# Altium PCB mini-rocket.PcbDoc (part 2 of 2)
Units mil, origin at the board's own origin, x right, y up, seen from the top; angles counter-clockwise.
Board outline 4500 x 2250 mil, 4 copper layers (Top Layer, GND, PWR, Bottom Layer), stack 63.138 mil thick; 83 components, 60 nets, 294 pads, 72 vias.
Unrouted connection lines stored in the file: 32.
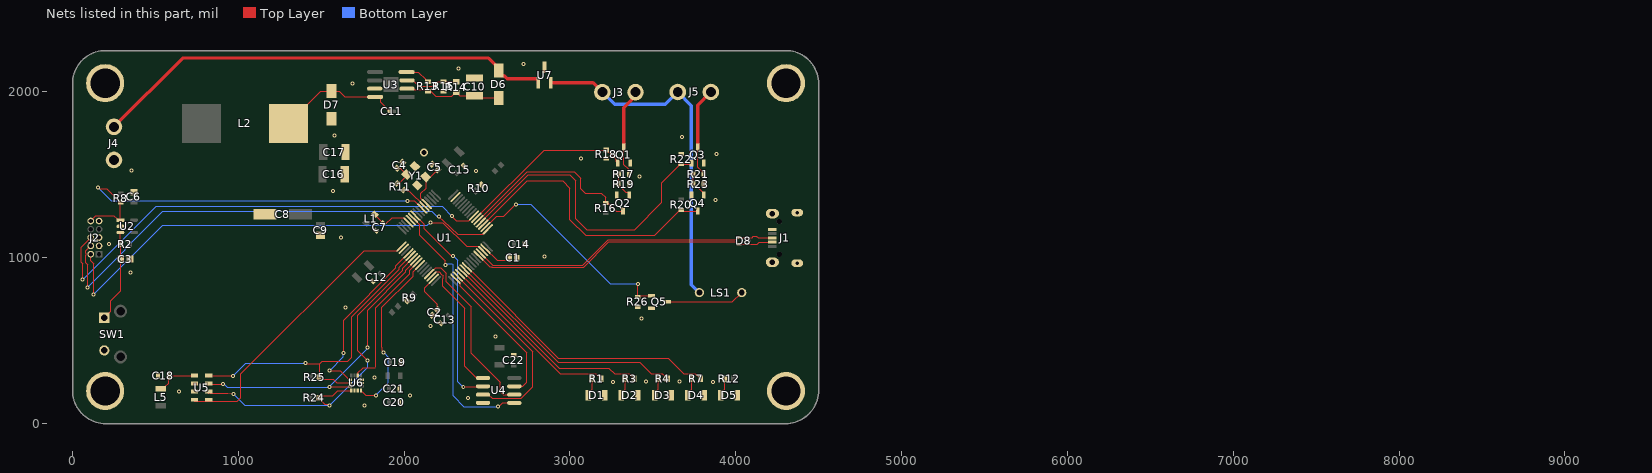
[diagram p4: the nets of this part, all layers, seen from the top]

## Via types
v1: diameter 24, hole 12, Top Layer to Bottom Layer, 71 vias
v2: diameter 50, hole 28, Top Layer to Bottom Layer, 1 vias

## Nets (pads, with @x,y where several pads share a name; then routed paths per layer and width w, separated by ;. In a path a pad name is that pad's centre, name@x,y a point inside that pad or via, vN(x,y) a via of type N, cw(c..) or ccw(c..) an arc to the next point about the centre after c; other vN are vias at no path point) (continued)
BUZZER: Q5.1 R26.1 U1.50 | length 1337.8
  Top Layer w6.79: U1.50@2490.37,1185.42 2491.73,1185.42 2519.3,1212.99 2521.32,1212.99 2557.93,1249.61 2600,1249.61 v1(2673.23,1322.83) ; v1(3409.45,842.52) 3409.45,764.45 R26.1@3409.56,764.34 3416.45,771.23 Q5.1@3491.33,771.23
  Bottom Layer w6.79: v1(2673.23,1322.83) 2763.78,1322.83 3244.09,842.52 v1(3409.45,842.52)
COM: C1.2 C2.2 C3.1 C4.2 C5.2 C6.1 C7.1 C8.K C9.1 C10.1 C12.2 C13.2 C14.2 C15.2 C16.2 C17.2 C18.2 C19.1 C20.1 C21.1 C22.2 D1.K D2.K D3.K D4.K D5.K D7.A J1.5 J1.Shell J2.3 J2.5 J2.9 J4.2 pad.2 pad.3 pad.4 pad.C Q1.2 Q2.2 Q3.2 Q4.2 Q5.2 R9.1 R10.1 R15.1 R18.1 R19.1 R22.2 R23.1 R26.2 SW1.2 U1.12 U1.18 U1.63 U2.2 U3.7 U4.4 U5.2 U5.3 U6.2 U6.3 U6.6 U6.7 U7.3 Y1.2 Y1.4 | length 3.4
  Top Layer w6.79: R10.1@2467.61,1439.5 R10.1@2467.61,1442.89
  other v1: 1760.83,108.27 2384.84,154.53 2035.43,169.29 642.72,193.9 3260.83,250 3861.22,250.98 3659.45,252.95 3459.65,253.94 1821.85,277.56 2552.17,524.61 2160,590 3430.12,632.87 1645.67,699.8 350,910 2847.44,1007.87 220.53,1083.61 1620.08,1122.05 3877.95,1347.44 1570.87,1401.57 3419.29,1490.16 2432.09,1522.64 355.31,1526.57 3066.93,1597.44 3882.87,1625 3675.2,1729.33 1579.72,1736.22 1687.99,2050.2 2327.76,2142.72 2720,2170
  other v2: 2120,1635
D_N: D8.2 J1.2 U1.44 | length 1873.2
  Top Layer w5.93: U1.44@2448.62,1012.82 2516.83,944.61 2528.86,944.61 2528.98,944.48 3082.28,944.48 3233.29,1095.49 3998.99,1095.49 4011.81,1082.68 4128.27,1082.68 4140.01,1094.41 J1.2@4220.83,1094.41
D_P: D8.1 J1.3 U1.45 | length 1861.4
  Top Layer w5.93: U1.45@2462.54,1026.74 2533.61,955.66 3077.65,955.66 3229.94,1107.95 3997.72,1107.95 4011.81,1122.05 4099.09,1122.05 4105.65,1128.61 4124.67,1128.61 4125,1128.28 4129.6,1128.28 4136.82,1121.05 J1.3@4219.78,1121.05
EJECT_1: J3.1 Q1.3 R17.2 | length 536.1
  Top Layer w6.79: Q1.3@3325,1668.23 3325,1561.57 3347.42,1539.15 3348.28,1539.15 3355.51,1531.91 R17.2@3355.51,1505 ; J3.1@3395,1975 J3.1@3395,1999
  Top Layer w20: Q1.3@3325,1668.23 3325,1905 J3.1@3395,1975
EJECT_2: J5.1 Q3.3 R21.2 | length 542.8
  Top Layer w6.79: Q3.3@3770,1668.23 3770,1545.43 3805.51,1509.92 R21.2@3805.51,1505
  Top Layer w20: Q3.3@3770,1668.23 3770,1920 J5.1@3850,2000
EN: R14.1 R15.2 U3.3 | length 330.5
  Top Layer w6.79: U3.3@2017.28,2070 2051.45,2070 2087.99,2033.46 2173.08,2033.46 2201.47,2061.85 R14.1@2320.87,2061.85
FIRE_1: Q1.1 R18.2 U1.54 | length 1062.6
  Top Layer w6.79: U1.54@2434.7,1241.1 2843.6,1650 3222.95,1650 3233.34,1639.61 3233.34,1636.87 3280.16,1590.04 3280.16,1579.21 Q1.1@3287.6,1571.77
FIRE_2: Q3.1 R22.1 U1.52 | length 1890.8
  Top Layer w6.79: U1.52@2462.54,1213.26 2749.28,1500 3000,1500 3035,1465 3035,1235 3100,1170 3390,1170 3554.16,1334.16 3554.16,1452.79 3656.66,1555.28 R22.1@3656.66,1567.07 ; R22.1@3670,1564.49 3725.32,1564.49 Q3.1@3732.6,1571.77
HOLD: U1.34 U4.7 | length 886.6
  Top Layer w6.79: U1.34@2309.42,873.63 2309.42,872.27 2336.99,844.7 2336.99,842.68 2337.86,841.82 2337.86,827.14 2738.38,426.62 2738.38,248.23 2715.15,225 U4.7@2664.49,225
INT1: U1.25 U6.4 | length 1034.6
  Top Layer w6.79: U6.4@1739.53,199.23 1739.53,194.8 1743.02,191.31 1747.45,191.31 1768.76,170 v1(1830,170) ; v1(1875.5,430) 1867.23,438.27 1867.23,459.08 1865.78,460.53 1865.78,700.78 2055,890 2055,915.72 2095.06,955.78 U1.25@2095.06,957.14
  Bottom Layer w6.79: v1(1830,170) 1905,245 1905,400.25 1875.5,429.75 v1(1875.5,430)
INT2: U1.24 U6.9 | length 872.8
  Top Layer w6.79: U6.9@1719.84,290.77 1721.24,292.17 1721.24,306.81 1752.84,338.4 1826.03,338.4 1830,342.38 1830,700 2035,905 2035,923.56 2081.14,969.7 U1.24@2081.14,971.06
LED_1: R1.1 U1.36 | length 1111
  Top Layer w6.79: U1.36@2337.26,901.47 2338.62,901.47 2366.19,873.9 2368.2,873.9 2942.1,300 3112.86,300 3112.96,300.09 3153.89,300.09 3153.99,300 3156.57,300 R1.1@3186.57,270
LED_2: R3.1 U1.37 | length 1302.8
  Top Layer w6.79: U1.37@2351.18,915.38 2352.54,915.38 2380.11,887.82 2382.12,887.82 2934.94,335 3235,335 3270,300 3312.86,300 3312.96,300.09 3353.89,300.09 3353.99,300 3356.57,300 R3.1@3386.57,270
LED_3: R4.1 U1.38 | length 1494.6
  Top Layer w6.79: U1.38@2365.1,929.3 2366.46,929.3 2394.03,901.74 2396.04,901.74 2927.78,370 3420,370 3490,300 3512.86,300 3512.96,300.09 3553.89,300.09 3553.99,300 3556.57,300 R4.1@3586.57,270
LED_4: R7.1 U1.39 | length 1686.5
  Top Layer w6.79: U1.39@2379.02,943.22 2380.38,943.22 2407.95,915.66 2409.96,915.66 2930.62,395 3591.28,395 3686.28,300 3712.86,300 3712.96,300.09 3753.89,300.09 3753.99,300 3756.57,300 R7.1@3786.57,270
NetC4_1: C4.1 R11.2 Y1.1 | length 159.5
  Top Layer w6.79: C4.1@1955.04,1541.66 1957.13,1539.57 1977.25,1539.57 Y1.1@2014.94,1501.88 2014.94,1496.25 R11.2@1960.13,1441.44
NetD1_A: D1.A R1.2 | length 109.7
  Top Layer w6.79: D1.A@3110,170 3110,184.76 3133.43,208.19 R1.2@3133.43,270
NetD2_A: D2.A R3.2 | length 109.7
  Top Layer w6.79: D2.A@3310,170 3310,184.76 3333.43,208.19 R3.2@3333.43,270
NetD3_A: D3.A R4.2 | length 109.7
  Top Layer w6.79: D3.A@3510,170 3510,184.76 3533.43,208.19 R4.2@3533.43,270
NetD4_A: D4.A R7.2 | length 109.7
  Top Layer w6.79: D4.A@3710,170 3710,184.76 3733.43,208.19 R7.2@3733.43,270
NetD5_A: D5.A R12.2 | length 109.7
  Top Layer w6.79: D5.A@3910,170 3910,184.76 3933.43,208.19 R12.2@3933.43,270
NetLS1_N: LS1.N Q5.3 | length 471.4
  Top Layer w6.79: Q5.3@3587.79,733.83 3979.73,733.83 LS1.N@4035.91,790
NetQ2_1: Q2.1 R17.1 R19.2 | length 161.1
  Top Layer w6.79: R17.1@3294.49,1505 3294.49,1446.3 R19.2@3293.19,1445 3293.19,1440.08 3337.76,1395.5 3349.97,1395.5 3357.4,1388.07 Q2.1@3357.4,1378.23
NetQ4_1: Q4.1 R21.1 R23.2 | length 159.2
  Top Layer w6.79: R21.1@3744.49,1505 3744.49,1440.08 3752.91,1431.66 3763.81,1431.66 3807.4,1388.07 Q4.1@3807.4,1378.23
OSC_IN: C5.1 U1.5 Y1.3 | length 281.1
  Top Layer w6.79: Y1.3@2129.08,1487.96 Y1.3@2131.86,1485.18 ; U1.5@2136.82,1324.62 2101.11,1360.33 2101.11,1387.87 2131.86,1418.62 Y1.3@2131.86,1485.18 ; C5.1@2202.44,1529.84 2160.55,1487.96 2160.47,1487.96 2157.69,1485.18 Y1.3@2131.86,1485.18
OSC_OUT: R11.1 U1.6 | length 163.3
  Top Layer w6.79: R11.1@2003.98,1404.56 2010.61,1411.18 2012.09,1411.18 2018.72,1404.56 2029.04,1404.56 U1.6@2122.9,1310.7
PGOOD: R13.2 U3.4 | length 162.7
  Top Layer w6.79: U3.4@2015,2120 2085.71,2120 2129.38,2076.33 2129.38,2071.41 2138.78,2062.01 R13.2@2143.7,2062.01 ; R13.2@2149.84,2066.85 R13.2@2154.84,2061.85
RESET_N: J2.10 R8.1 U1.7 U2.1 | length 2490
  Top Layer w6.79: J2.10@110,1222 141.39,1253.39 249.96,1253.39 268.31,1235.04 268.31,1234.48 275.39,1227.4 U2.1@288.64,1227.4 288.64,1334.04 R8.1@290,1335.39 287.05,1335.39 207.48,1414.96 162.8,1414.96 v1(154.53,1423.23) ; v1(2019.68,1343.72) 2062.04,1343.72 U1.7@2108.98,1296.78
  Bottom Layer w6.79: v1(154.53,1423.23) 234.04,1343.72 v1(2019.68,1343.72)
SENSE_1: Q2.3 R16.2 U1.53 | length 1153.4
  Top Layer w6.79: U1.53@2448.62,1227.18 2741.44,1520 3025,1520 3065,1480 3065,1415.61 3090.61,1390 3190,1390 3215,1365 R16.2@3215,1340.51 ; R16.2@3215,1330.51 R16.2@3215,1340.51 ; Q2.3@3320,1281.77 3278.66,1281.77 3219.92,1340.51 R16.2@3215,1340.51
SENSE_2: Q4.3 R20.2 U1.51 | length 1718.8
  Top Layer w6.79: U1.51@2476.45,1199.34 2742.11,1465 2955,1465 3000,1420 3000,1230 3095,1135 3510.59,1135 3665.08,1289.49 R20.2@3670,1289.49 3677.72,1281.77 Q4.3@3770,1281.77
SPI1_CS_ALTIMITER: U1.17 U5.4 U5.5 | length 1721.6
  Top Layer w6.79: U5.4@733,134.95 821.31,134.95 993.22,134.95 1015.75,157.48 1015.75,301.18 1758.01,1043.44 1958.65,1043.44 U1.17@1983.71,1068.5
SPI1_CS_IMU: U1.20 U6.12 | length 1050.7
  Top Layer w6.79: v1(1550,320) 1550.85,319.15 1588.57,319.15 1615.18,319.15 1669.65,264.69 U6.12@1674.07,264.69 ; v1(1634.61,425) 1634.61,624.61 1950,940 1950,951.27 U1.20@2025.47,1026.74
  Bottom Layer w6.79: v1(1550,320) 1632.82,402.82 1632.82,423.21 v1(1634.61,425)
SPI1_MISO: R24.2 U1.22 U5.6 U6.1 | length 2215.6
  Top Layer w6.79: U5.6@819.61,184.17 U5.6@821.31,184.17 ; U5.6@821.31,192.98 829.73,184.57 937.49,184.57 v1(970.44,179.56) ; v1(1550,110) 1542.95,117.05 1520.87,117.05 1496.47,141.45 1494.39,141.45 1482.89,152.95 1482.89,157.11 1494.39,168.61 1568.86,168.61 1599.48,199.23 U6.1@1680.47,199.23 ; v1(1780,380) 1720,440 1720,655 1991.11,926.11 1991.11,936.7 U1.22@2053.3,998.9 ; U1.22@2052.3,999.9 U1.22@2053.3,1000.9
  Bottom Layer w6.79: v1(970.44,179.56) 1040,110 v1(1550,110) 1780,340 v1(1780,380)
SPI1_MOSI: U1.23 U5.7 U6.14 | length 1845.2
  Top Layer w6.79: U5.7@819.61,233.38 819.61,233.78 823.43,237.59 v1(908,237.59) ; v1(1550,220) 1552.66,222.66 1671.42,222.66 U6.14@1674.07,225.31 ; v1(1780,460) 1780,685 2010,915 2010,926.4 2067.22,983.62 U1.23@2067.22,984.98
  Bottom Layer w6.79: v1(908,237.59) 915.99,237.59 933.58,220 v1(1550,220) 1550,225 1780,455 v1(1780,460)
SPI1_SCK: R25.2 U1.21 U5.8 U6.13 | length 1962
  Top Layer w6.79: U5.8@819.61,282.59 824.61,287.59 v1(968,287.59) ; v1(1405,365) 1409.38,360.62 1490.62,360.62 ; R25.2@1485.62,280 1485.62,277.92 1497.12,266.42 1570.93,266.42 1592.35,245 U6.13@1674.07,245 ; R25.2@1490.62,280 1490.62,360.62 ; U1.21@2039.38,1012.82 1970,943.44 1970,930 1685,645 1685,400 1660,375 1505,375 1490.62,360.62
  Bottom Layer w6.79: v1(968,287.59) 1045.41,365 v1(1405,365)
SPI2_CS: U1.30 U4.1 | length 835.3
  Top Layer w6.79: U1.30@2164.66,887.55 2166.02,887.55 2194.45,915.98 2210.8,915.98 2224.72,902.06 2234.85,891.93 2234.85,877.6 2231.25,873.99 2231.25,828.75 2365,695 2365,345 2431.78,278.22 2472.29,278.22 U4.1@2475.51,275
SPI2_MISO: U1.10 U4.2 | length 1288.4
  Top Layer w6.79: U1.10@2067.22,1255.02 2121.09,1201.15 2121.09,1173.91 2280.34,1014.66 2292.42,1014.66 v1(2295.28,1011.81) ; v1(2356.39,220) 2358.89,222.5 2473.01,222.5 U4.2@2475.51,225
  Bottom Layer w6.79: v1(2295.28,1011.81) 2322.83,984.25 2322.83,253.56 2347.2,229.19 2356.39,229.19 v1(2356.39,220)
SPI2_MOSI: U1.11 U4.5 | length 1616.9
  Top Layer w6.79: U1.11@2053.3,1241.1 2053.3,1239.74 2095,1198.04 2095,1135 2248.03,981.97 v1(2248.03,956.69) ; v1(2566.93,102.36) 2571.4,102.36 2594.04,125 U4.5@2664.49,125
  Bottom Layer w6.79: v1(2248.03,956.69) 2256.3,964.96 2281.57,964.96 2281.64,965.03 2290.84,965.03 2294.81,961.06 2294.81,166.8 2359.25,102.36 v1(2566.93,102.36)
SPI2_SCK: U1.29 U4.6 | length 1073.3
  Top Layer w6.79: U1.29@2150.74,901.47 2152.1,901.47 2190.63,940 2220,940 2253.15,906.85 2253.15,856.85 2405,705 2405,425 2579.83,250.17 2579.83,193.12 2597.95,175 U4.6@2664.49,175
SW: C11.1 D7.C L2.1 U3.8 | length 760.6
  Top Layer w6.79: L2.1@1301.81,1810 1496.73,2004.92 D7.C@1562.01,2004.92 1607.87,2004.92 1642.8,1970 U3.8@1824.76,1970 1849.64,1970 1857.82,1961.82 1857.82,1936.94 1907.41,1887.35 1907.41,1886.84 1914.25,1880 C11.1@1915.04,1880
SWCLK: J2.4 U1.49 | length 2945.6
  Top Layer w6.79: v1(90,820) 91.16,821.16 91.16,958.44 79.34,970.25 79.34,1015.24 cw(c110,1022) 79.34,1028.76 79.34,1041.34 J2.4@110,1072 ; v1(2208.7,1247.63) 2237.11,1222.88 2321.71,1141.73 2473.16,1141.73 2502.93,1171.5 U1.49@2504.29,1171.5
  Bottom Layer w6.79: v1(90,820) 319.15,1049.15 319.15,1054.15 545,1280 2166.9,1280 2199.27,1247.63 v1(2208.7,1247.63)
SWDIO: J2.2 U1.46 | length 2845.1
  Top Layer w6.79: J2.2@110,1022 110,981.69 127.3,964.39 v1(127.3,779.65) ; v1(2157.48,1212.6) 2207.72,1211.25 ccw(c2208.7,1247.63) 2211.6,1211.35 2227.23,1212.6 2232.85,1212.6 2376.36,1069.09 2446.66,1069.09 U1.46@2473.09,1042.66
  Bottom Layer w6.79: v1(127.3,779.65) 542.65,1195 2139.88,1195 v1(2157.48,1212.6)
T_TRACESWO: J2.6 U1.55 | length 2873.6
  Top Layer w6.79: v1(61.16,867.8) 61.16,962.83 51.17,972.81 51.17,1063.17 J2.6@110,1122 ; v1(2287.4,1251.97) 2314.96,1224.41 2388.81,1224.41 2419.42,1255.02 U1.55@2420.78,1255.02
  Bottom Layer w6.79: v1(61.16,867.8) 183.96,990.61 184.72,990.61 504.11,1310 2229.37,1310 v1(2287.4,1251.97)
User_RST: C3.2 R2.2 SW1.1 U2.3 | length 556.7
  Top Layer w6.79: SW1.1@191.5,638.5 230,677 230,740 291.54,801.54 C3.2@291.54,991.9 R2.2@291.54,1081.9 288.64,1084.8 U2.3@288.64,1152.6
V_CAP_1: C2.1 U1.31 | length 238.5
  Top Layer w6.79: U1.31@2178.58,873.63 2178.58,872.27 2125,818.69 2125,796.43 2200.28,721.14 2200.28,695.28 C2.1@2195.46,690.46
V_CAP_2: C1.1 U1.47 | length 178.5
  Top Layer w6.79: U1.47@2490.37,1054.58 2559.95,985 2617.96,985 2632.96,1000 C1.1@2633.86,1000
VBATT: D6.A J4.1 U7.1 | length 2820.7
  Top Layer w20: J4.1@250,1790 664.72,2204.72 2508.86,2204.72 2570.87,2142.72 2570.87,2118.31 2590.39,2098.78 2602.6,2098.78 2622.2,2079.17 2808.23,2079.17 2809.06,2078.35 U7.1@2809.06,2055.12
VBATT_CONTROLLED: J3.2 J5.2 LS1.P U7.2 | length 2114.8
  Top Layer w20: U7.2@2883.86,2055.12 3138.88,2055.12 J3.2@3195,1999
  Bottom Layer w20: J3.2@3195,1999 3268.8,1925.2 3575.2,1925.2 J5.2@3650,2000 3732.28,1917.72 3732.28,837.72 LS1.P@3780,790
VDD: C22.1 L7.2 U4.8 | length 165.7
  Top Layer w6.79: L7.2@2574.8,356.3 2655.51,356.3 C22.1@2660.43,351.38 2664.49,347.32 U4.8@2664.49,275
VDD: C18.1 L5.2 U5.1 | length 262.3
  Top Layer w6.79: L5.2@532.19,210.16 546.95,210.16 560.29,223.5 560.29,225.29 579.65,244.65 C18.1@579.65,287.48 582.12,289.95 733.24,289.95 U5.1@734.69,291.41
VDDA: C7.2 L1.2 U1.13 | length 255.4
  Top Layer w6.79: L1.2@1824.41,1262.34 1824.41,1257.6 C7.2@1874.54,1207.47 1878.02,1203.99 1889.93,1203.99 1927.63,1241.69 1995.67,1241.69 2024.11,1213.26 U1.13@2025.47,1213.26
VIN: C10.2 D6.C R13.1 R14.2 U3.2 | length 598.8
  Top Layer w6.79: U3.2@2017.28,2020 2056.25,2020 2061.92,2014.32 2134.3,2014.32 R13.1@2143.7,2004.92 ; R13.1@2143.7,2004.76 2159.76,2004.76 2191.62,1972.91 2287.87,1972.91 2297.09,1982.13 2297.09,1984.3 2310.83,1998.03 R14.2@2312.99,1998.03 2315.16,1998.03 2335.83,1977.36 C10.2@2425.2,1977.36 2438.58,1963.98 D6.C@2570.87,1963.98
WP: U1.35 U4.3 | length 1191.3
  Top Layer w6.79: U1.35@2323.34,887.55 2323.34,886.19 2775,434.53 2775,221.2 2705.6,151.8 2530.21,151.8 2507.01,175 U4.3@2475.51,175
pads on no net: J1.1 J1.4 J1.MH1 J1.MH2 J2.7 J2.8 SW1.3 SW1.4 U1.2 U1.3 U1.4 U1.8 U1.9 U1.14 U1.15 U1.16 U1.26 U1.27 U1.33 U1.40 U1.41 U1.42 U1.43 U1.56 U1.57 U1.58 U1.59 U1.61 U1.62 U2.4 U3.6 U3.9 U6.10 U6.11
copper on no net: | length 103920.8
  Top Layer w1: 8209.46,735.32 8309.15,835 8429.15,955 8549.15,1075 8669.15,1195 8789.15,1315 8909.15,1435 9029.15,1555 9149.15,1675 9269.15,1795 9329.15,1855 ; 8209.46,795.32 8249.15,835 8369.15,955 8489.15,1075 8609.15,1195 8729.15,1315 8849.15,1435 8969.15,1555 9089.15,1675 9209.15,1795 9329.15,1915 ; 8209.46,855.32 8309.15,955 8429.15,1075 8549.15,1195 8669.15,1315 8789.15,1435 8909.15,1555 9029.15,1675 9149.15,1795 9269.15,1915 9329.15,1975 ; 8209.46,915.32 8249.15,955 8369.15,1075 8489.15,1195 8609.15,1315 8729.15,1435 8849.15,1555 8969.15,1675 9089.15,1795 9209.15,1915 9329.15,2035 ; 8209.46,975.32 8309.15,1075 8429.15,1195 8549.15,1315 8669.15,1435 8789.15,1555 8909.15,1675 9029.15,1795 9149.15,1915 9269.15,2035 ; 8209.46,1035.32 8249.15,1075 8369.15,1195 8489.15,1315 8609.15,1435 8729.15,1555 8849.15,1675 8969.15,1795 9089.15,1915 9209.15,2035 ; 8209.46,1095.32 8309.15,1195 8429.15,1315 8549.15,1435 8669.15,1555 8789.15,1675 8909.15,1795 9029.15,1915 9149.15,2035 ; 8209.46,1155.32 8249.15,1195 8369.15,1315 8489.15,1435 8609.15,1555 8729.15,1675 8849.15,1795 8969.15,1915 9089.15,2035 ; 8209.46,1215.32 8309.15,1315 8429.15,1435 8549.15,1555 8669.15,1675 8789.15,1795 8909.15,1915 9029.15,2035 ; 8209.46,1275.32 8249.15,1315 8369.15,1435 8489.15,1555 8609.15,1675 8729.15,1795 8849.15,1915 8969.15,2035 ; 8209.46,1335.32 8309.15,1435 8429.15,1555 8549.15,1675 8669.15,1795 8789.15,1915 8909.15,2035 ; 8209.46,1395.32 8249.15,1435 8369.15,1555 8489.15,1675 8609.15,1795 8729.15,1915 8849.15,2035 ; 8209.46,1455.32 8309.15,1555 8429.15,1675 8549.15,1795 8669.15,1915 8789.15,2035 ; 8209.46,1515.32 8249.15,1555 8369.15,1675 8489.15,1795 8609.15,1915 8729.15,2035 ; 8209.46,1575.32 8309.15,1675 8429.15,1795 8549.15,1915 8669.15,2035 ; 8209.46,1635.32 8249.15,1675 8369.15,1795 8489.15,1915 8609.15,2035 ; 8209.46,1695.32 8309.15,1795 8429.15,1915 8549.15,2035 ; 8209.46,1755.32 8249.15,1795 8369.15,1915 8489.15,2035 ; 8209.46,1815.32 8309.15,1915 8429.15,2035 ; 8209.46,1875.32 8249.15,1915 8369.15,2035 ; 8209.46,1935.32 8309.15,2035 ; 8209.46,1995.32 8249.15,2035 ; 8249.15,715 8369.15,835 8489.15,955 8609.15,1075 8729.15,1195 8849.15,1315 8969.15,1435 9089.15,1555 9209.15,1675 9329.15,1795 ; 8309.15,715 8429.15,835 8549.15,955 8669.15,1075 8789.15,1195 8909.15,1315 9029.15,1435 9149.15,1555 9269.15,1675 9329.15,1735 ; 8369.15,715 8489.15,835 8609.15,955 8729.15,1075 8849.15,1195 8969.15,1315 9089.15,1435 9209.15,1555 9329.15,1675 ; 8429.15,715 8549.15,835 8669.15,955 8789.15,1075 8909.15,1195 9029.15,1315 9149.15,1435 9269.15,1555 9329.15,1615 ; 8489.15,715 8609.15,835 8729.15,955 8849.15,1075 8969.15,1195 9089.15,1315 9209.15,1435 9329.15,1555 ; 8549.15,715 8669.15,835 8789.15,955 8909.15,1075 9029.15,1195 9149.15,1315 9269.15,1435 9329.15,1495 ; 8609.15,715 8729.15,835 8849.15,955 8969.15,1075 9089.15,1195 9209.15,1315 9329.15,1435 ; 8669.15,715 8789.15,835 8909.15,955 9029.15,1075 9149.15,1195 9269.15,1315 9329.15,1375 ; 8729.15,715 8849.15,835 8969.15,955 9089.15,1075 9209.15,1195 9329.15,1315 ; 8789.15,715 8909.15,835 9029.15,955 9149.15,1075 9269.15,1195 9329.15,1255 ; 8849.15,715 8969.15,835 9089.15,955 9209.15,1075 9329.15,1195 ; 8909.15,715 9029.15,835 9149.15,955 9269.15,1075 9329.15,1135 ; 8969.15,715 9089.15,835 9209.15,955 9329.15,1075 ; 9029.15,715 9149.15,835 9269.15,955 9329.15,1015 ; 9089.15,715 9209.15,835 9329.15,955 ; 9149.15,715 9269.15,835 9329.15,895 ; 9209.15,715 9329.15,835 ; 9269.15,715 9329.15,775
  Top Layer w15: 4790.34,835 5200.26,835 6130,835 6989.77,835 7639.6,835 8209.46,835 9329.15,835 ; 4790.34,955 5200.26,955 6130,955 6989.77,955 7639.6,955 8209.46,955 9329.15,955 ; 4790.34,1075 5200.26,1075 6130,1075 6989.77,1075 7639.6,1075 8209.46,1075 9329.15,1075 ; 4790.34,1195 5200.26,1195 6130,1195 6989.77,1195 7639.6,1195 8209.46,1195 9329.15,1195 ; 4790.34,1315 5200.26,1315 6130,1315 6989.77,1315 7639.6,1315 8209.46,1315 9329.15,1315 ; 4790.34,1435 5200.26,1435 6130,1435 6989.77,1435 7639.6,1435 8209.46,1435 9329.15,1435 ; 4790.34,1555 5200.26,1555 6130,1555 6989.77,1555 7639.6,1555 8209.46,1555 9329.15,1555 ; 4790.34,1675 5200.26,1675 6130,1675 6989.77,1675 7639.6,1675 8209.46,1675 9329.15,1675 ; 4790.34,1795 5200.26,1795 6130,1795 6989.77,1795 7639.6,1795 8209.46,1795 9329.15,1795 ; 4790.34,1915 5200.26,1915 6130,1915 6989.77,1915 7639.6,1915 8209.46,1915 9329.15,1915 ; 4790.34,2035 9329.15,2035 ; 5200.26,2155 5200.26,715 ; 6130,2155 6130,715 ; 6989.77,2155 6989.77,715 ; 7639.6,2155 7639.6,715 ; 8209.46,2155 8209.46,715 ; 5200.26,715 4790.34,715 4790.34,2155 9329.15,2155 9329.15,715 8209.46,715 ; 5200.26,715 6130,715 ; 6130,715 6989.77,715 ; 6989.77,715 7639.6,715 ; 7639.6,715 8209.46,715

## Polygon pours and split planes (outlines as drawn)
COM on GND "COM_L02_P008" (solid, pour order 8): 0,200 ccw(c200,200) 200,0 4300,0 ccw(c4300,200) 4500,200 4500,2050 ccw(c4300,2050) 4300,2250 200,2250 ccw(c200,2050) 0,2050
COM on Bottom Layer "COM_L04_P007" (solid, pour order 7): 0,200 ccw(c200,200) 200,0 4300,0 ccw(c4300,200) 4500,200 4500,2050 ccw(c4300,2050) 4300,2250 200,2250 ccw(c200,2050) 0,2050
3V3 on PWR "3V3_L03_P010" (solid, pour order 10): 0,200 ccw(c200,200) 200,0 4300,0 ccw(c4300,200) 4500,200 4500,2050 ccw(c4300,2050) 4300,2250 200,2250 ccw(c200,2050) 0,2050
COM on Top Layer "COM_L01_P004" (solid, pour order 4): 0,200 ccw(c200,200) 200,0 4300,0 ccw(c4300,200) 4500,200 4500,2050 ccw(c4300,2050) 4300,2250 200,2250 ccw(c200,2050) 0,2050

## Keep-outs
Keep-Out Layer:
  the board outline again, w50

## Other copper
Top Layer:
  pour cut-out: 1320,740 520,740 520,880.64 1320,880.64
  pour cut-out: 1320,740 520,740 520,880.64 1320,880.64
  pour cut-out: 1320,740 520,740 520,880.64 1320,880.64
  text "Layer" at 4860.34,2065 h60
  text "Name" at 5270.26,2065 h60
  text "Material" at 6200,2065 h60
  text "Thickness" at 7059.77,2065 h60
  text "Constant" at 7709.6,2065 h60
  text "Board Layer Stack" at 8279.46,2065 h60
  text "Top Overlay" at 5270.26,1945 h60
  text "Top Solder" at 5270.26,1825 h60
  text "Solder Resist" at 6200,1825 h60
  text "0.40mil" at 7059.77,1825 h60
  text "3.5" at 7709.6,1825 h60
  text "1" at 4860.34,1705 h60
  text "Top Layer" at 5270.26,1705 h60
  text "1.38mil" at 7059.77,1705 h60
  text "Dielectric 2" at 5270.26,1585 h60
  text "PP-006" at 6200,1585 h60
  text "3.91mil" at 7059.77,1585 h60
  text "4.05" at 7709.6,1585 h60
  text "2" at 4860.34,1465 h60
  text "GND" at 5270.26,1465 h60
  text "CF-004" at 6200,1465 h60
  text "1.38mil" at 7059.77,1465 h60
  text "Dielectric 1" at 5270.26,1345 h60
  text "FR-4" at 6200,1345 h60
  text "49.80mil" at 7059.77,1345 h60
  text "4.6" at 7709.6,1345 h60
  text "3" at 4860.34,1225 h60
  text "PWR" at 5270.26,1225 h60
  text "CF-004" at 6200,1225 h60
  text "1.38mil" at 7059.77,1225 h60
  text "Dielectric 3" at 5270.26,1105 h60
  text "PP-006" at 6200,1105 h60
  text "3.91mil" at 7059.77,1105 h60
  text "4.05" at 7709.6,1105 h60
  text "4" at 4860.34,985 h60
  text "Bottom Layer" at 5270.26,985 h60
  text "1.38mil" at 7059.77,985 h60
  text "Bottom Solder" at 5270.26,865 h60
  text "Solder Resist" at 6200,865 h60
  text "0.40mil" at 7059.77,865 h60
  text "3.5" at 7709.6,865 h60
  text "Bottom Overlay" at 5270.26,745 h60
  text "Total board thickness:" at 4860.34,625 h60
  text "63.94mil" at 7059.77,625 h60
GND:
  text "\"J'ai dloua\" - Plouffe" at 569.1,781.6 h80
Bottom Layer:
  pour cut-out: 1320,740 520,740 520,880.64 1320,880.64

## Silkscreen, mask and mechanical layers (free items; w line width, h text height)
Top Solder:
  text "Justin Laguë A-2022" at 4454.9,1305 h80 r90
Drill Drawing:
  circle w10: c-3985.55,4413.33 r33.33
  circle w10: c-3985.55,3513.33 r20
  circle w10: c-3985.55,3513.33 r33.33
  lines w10: -4018.88,3096.67 -3952.21,3096.67 -3985.55,3030 -4018.88,3096.67 ; -4018.88,3196.67 -4002.21,3196.67 -4002.21,3180 -3968.88,3180 -3968.88,3196.67 -3952.21,3196.67 -3952.21,3230 -3968.88,3230 -3968.88,3246.67 -4002.21,3246.67 -4002.21,3230 -4018.88,3230 -4018.88,3196.67 ; -4018.88,3330 -4018.88,3346.67 -4002.21,3363.33 -4018.88,3380 -4018.88,3396.67 -4002.21,3396.67 -3985.55,3380 -3968.88,3396.67 -3952.21,3396.67 -3952.21,3380 -3968.88,3363.33 -3952.21,3346.67 -3952.21,3330 -3968.88,3330 -3985.55,3346.67 -4002.21,3330 -4018.88,3330 ; -4018.88,3646.67 -4002.21,3646.67 -3985.55,3630 -3968.88,3646.67 -3952.21,3646.67 -3968.88,3663.33 -3952.21,3680 -3968.88,3680 -3985.55,3696.67 -4002.21,3680 -4018.88,3680 -4002.21,3663.33 -4018.88,3646.67 ; -4018.88,3780 -3985.55,3796.67 -3952.21,3780 -3968.88,3813.33 -3952.21,3846.67 -3985.55,3830 -4018.88,3846.67 -4002.21,3813.33 -4018.88,3780 ; -4018.88,3963.33 -3985.55,3930 -3952.21,3963.33 -3985.55,3996.67 -4018.88,3963.33 ; -4018.88,4080 -3952.21,4080 -3952.21,4146.67 -4018.88,4146.67 -4018.88,4080 ; -4018.88,4296.67 -3952.21,4296.67 -3985.55,4230 -4018.88,4296.67 ; -4018.88,4530 -3952.21,4530 -3952.21,4596.67 -4018.88,4596.67 -4018.88,4530 ; -4005.55,3083.33 -3965.55,3083.33 -3985.55,3043.33 -4005.55,3083.33 ; -4005.55,4543.33 -3965.55,4543.33 -3965.55,4583.33 -4005.55,4583.33 -4005.55,4543.33
  lines w15: -4078.67,2985 9489.5,2985 ; -4078.67,4635 9489.5,4635 ; -3527.8,2835 -3527.8,4785 ; -2937.95,2835 -2937.95,4785 ; -1798.29,2835 -1798.29,4785 ; -1292.41,2835 -1292.41,4785 ; -558.61,2835 -558.61,4785 ; 940.94,2835 940.94,4785 ; 1530.79,2835 1530.79,4785 ; 2276.59,2835 2276.59,4785 ; 3476.24,2835 3476.24,4785 ; 4330,2835 4330,4785 ; 5663.61,2835 5663.61,4785 ; 6997.22,2835 6997.22,4785 ; 8086.9,2835 8086.9,4785 ; -4078.67,2835 9489.5,2835 9489.5,4785 -4078.67,4785 -4078.67,2835
  text "Symbol" at -3988.67,4680 h72
  text "Count" at -3482.8,4680 h72
  text "Hole Size" at -2892.95,4680 h72
  text "Plated" at -1753.29,4680 h72
  text "Hole Type" at -1247.41,4680 h72
  text "Drill Layer Pair" at -513.61,4680 h72
  text "Via/Pad" at 985.94,4680 h72
  text "Pad Shape" at 1575.79,4680 h72
  text "Template" at 2321.59,4680 h72
  text "Description" at 3521.24,4680 h72
  text "Hole Tolerance (+)" at 4375,4680 h72
  text "Hole Tolerance (-)" at 5708.61,4680 h72
  text "Hole Length" at 7042.22,4680 h72
  text "Routed Path Length" at 8131.9,4680 h72
  text "1" at -3482.8,4530 h60
  text "28.00mil (0.711mm)" at -2892.95,4530 h60
  text "PTH" at -1753.29,4530 h60
  text "Round" at -1247.41,4530 h60
  text "Top Layer - Bottom Layer" at -513.61,4530 h60
  text "Via" at 985.94,4530 h60
  text "Rounded" at 1575.79,4530 h60
  text "v127h71" at 2321.59,4530 h60
  text "-" at 7042.22,4530 h60
  text "-" at 8131.9,4530 h60
  text "2" at -3482.8,4380 h60
  text "21.65mil (0.550mm)" at -2892.95,4380 h60
  text "PTH" at -1753.29,4380 h60
  text "Slot" at -1247.41,4380 h60
  text "Top Layer - Bottom Layer" at -513.61,4380 h60
  text "Pad" at 985.94,4380 h60
  text "Rounded" at 1575.79,4380 h60
  text "r115_180h55_120r100" at 2321.59,4380 h60
  text "47.24mil (1.200mm)" at 7042.22,4380 h60
  text "25.59mil (0.650mm)" at 8131.9,4380 h60
  text "2" at -3482.8,4230 h60
  text "31.50mil (0.800mm)" at -2892.95,4230 h60
  text "NPTH" at -1753.29,4230 h60
  text "Round" at -1247.41,4230 h60
  text "Top Layer - Bottom Layer" at -513.61,4230 h60
  text "Pad" at 985.94,4230 h60
  text "Rounded" at 1575.79,4230 h60
  text "c80hn80" at 2321.59,4230 h60
  text "-" at 7042.22,4230 h60
  text "-" at 8131.9,4230 h60
  text "2" at -3482.8,4080 h60
  text "33.47mil (0.850mm)" at -2892.95,4080 h60
  text "PTH" at -1753.29,4080 h60
  text "Slot" at -1247.41,4080 h60
  text "Top Layer - Bottom Layer" at -513.61,4080 h60
  text "Pad" at 985.94,4080 h60
  text "Rounded" at 1575.79,4080 h60
  text "r145_200h85_140r100" at 2321.59,4080 h60
  text "55.12mil (1.400mm)" at 7042.22,4080 h60
  text "21.65mil (0.550mm)" at 8131.9,4080 h60
  text "2" at -3482.8,3930 h60
  text "35.43mil (0.900mm)" at -2892.95,3930 h60
  text "PTH" at -1753.29,3930 h60
  text "Round" at -1247.41,3930 h60
  text "Top Layer - Bottom Layer" at -513.61,3930 h60
  text "Pad" at 985.94,3930 h60
  text "Rounded" at 1575.79,3930 h60
  text "c141h90" at 2321.59,3930 h60
  text "-" at 7042.22,3930 h60
  text "-" at 8131.9,3930 h60
  text "2" at -3482.8,3780 h60
  text "39.00mil (0.991mm)" at -2892.95,3780 h60
  text "PTH" at -1753.29,3780 h60
  text "Round" at -1247.41,3780 h60
  text "Top Layer - Bottom Layer" at -513.61,3780 h60
  text "Pad" at 985.94,3780 h60
  text "(Mixed)" at 1575.79,3780 h60
  text "(Mixed)" at 2321.59,3780 h60
  text "-" at 7042.22,3780 h60
  text "-" at 8131.9,3780 h60
  text "2" at -3482.8,3630 h60
  text "51.00mil (1.295mm)" at -2892.95,3630 h60
  text "PTH" at -1753.29,3630 h60
  text "Round" at -1247.41,3630 h60
  text "Top Layer - Bottom Layer" at -513.61,3630 h60
  text "Pad" at 985.94,3630 h60
  text "Rounded" at 1575.79,3630 h60
  text "c200h130m200p-1" at 2321.59,3630 h60
  text "-" at 7042.22,3630 h60
  text "-" at 8131.9,3630 h60
  text "4" at -3482.8,3480 h60
  text "177.01mil (4.496mm)" at -2892.95,3480 h60
  text "PTH" at -1753.29,3480 h60
  text "Round" at -1247.41,3480 h60
  text "Top Layer - Bottom Layer" at -513.61,3480 h60
  text "Pad" at 985.94,3480 h60
  text "Rounded" at 1575.79,3480 h60
  text "c584h450" at 2321.59,3480 h60
  text "-" at 7042.22,3480 h60
  text "-" at 8131.9,3480 h60
  text "6" at -3482.8,3330 h60
  text "60.00mil (1.524mm)" at -2892.95,3330 h60
  text "PTH" at -1753.29,3330 h60
  text "Round" at -1247.41,3330 h60
  text "Top Layer - Bottom Layer" at -513.61,3330 h60
  text "Pad" at 985.94,3330 h60
  text "Rounded" at 1575.79,3330 h60
  text "c254h152m267" at 2321.59,3330 h60
  text "-" at 7042.22,3330 h60
  text "-" at 8131.9,3330 h60
  text "10" at -3482.8,3180 h60
  text "26.00mil (0.660mm)" at -2892.95,3180 h60
  text "PTH" at -1753.29,3180 h60
  text "Round" at -1247.41,3180 h60
  text "Top Layer - Bottom Layer" at -513.61,3180 h60
  text "Pad" at 985.94,3180 h60
  text "(Mixed)" at 1575.79,3180 h60
  text "(Mixed)" at 2321.59,3180 h60
  text "-" at 7042.22,3180 h60
  text "-" at 8131.9,3180 h60
  text "71" at -3482.8,3030 h60
  text "12.00mil (0.305mm)" at -2892.95,3030 h60
  text "PTH" at -1753.29,3030 h60
  text "Round" at -1247.41,3030 h60
  text "Top Layer - Bottom Layer" at -513.61,3030 h60
  text "Via" at 985.94,3030 h60
  text "Rounded" at 1575.79,3030 h60
  text "v61h30" at 2321.59,3030 h60
  text "-" at 7042.22,3030 h60
  text "-" at 8131.9,3030 h60
  text "104 Total" at -3482.8,2880 h60
  text "Slot definitions :" at -3988.67,2735.03 h60
  text "Routed Path Length" at -2955.98,2735.03 h60
  text "= Calculated from tool start centre position to tool end centre position." at -1853.32,2735.03 h60
  text "Hole Length" at -2955.98,2635.05 h60
  text "= Routed Path Length + Tool Size = Slot length as defined in the PCB layout" at -2263.18,2635.05 h60

## Text inside footprints (layer, text, board x,y; h text height)
J1: Mechanical 2 "PCB Edge" at 4464.92,1068.82 h16 r90